# EAGLE board XmegaA4U_v2.1 (EAGLE 6.3)
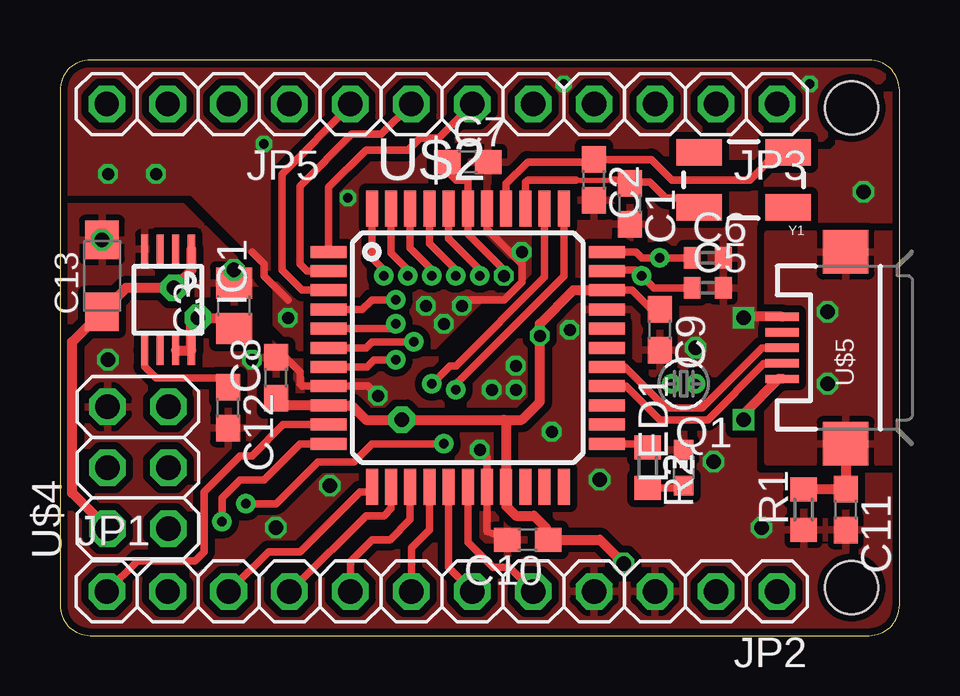
[diagram p0: board, top side]
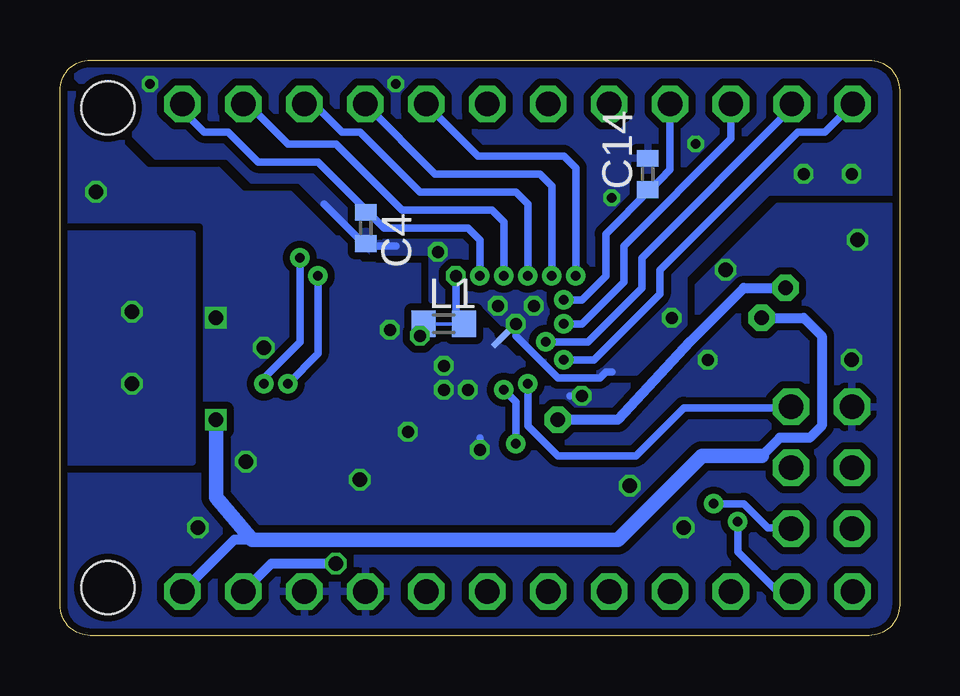
[diagram p1: board, bottom side, seen from below]

Size 35 x 24 mm. Coordinates in mm from the lower left corner, seen from the top.
Outline: 0,22.73 0,1.27 arc90 1.27,0 33.73,0 arc90 35,1.27 35,22.73 arc90 33.73,24 1.27,24 arc90 0,22.73
Copper layers (1*16): Top 0.035mm / dielectric 1.5mm / Bottom 0.035mm
Design rules "Fusion_eagle_rule_v1.1 *": minimum track width 6mil, minimum drill 12mil, track to track 6mil, track to pad 6mil, pad to pad 6mil, via to via 6mil, smd to smd 0mil, copper to edge 10mil, drill to drill 10mil, minimum pad ring 0.1mm, minimum via ring 6mil, stop-mask expansion 2mil, vias tented up to drill 100mil, thermal gap 10mil
Holes 2.2 mm at 33,22 33,2

## Footprints (pad centres in the part's own frame; a part is rotated, then mirrored left to right if it is on the bottom)
C0603 = smd 1.1 x 1: 1 -0.85,0; 2 0.85,0
C0805 = smd 1.3 x 1.5: 1 -0.95,0; 2 0.95,0
C0402 = smd 0.7 x 0.9: 1 -0.65,0; 2 0.65,0
SMC_A = smd 1.6 x 1.4: + -1.5,0; - 1.5,0
MSOP08 = smd 0.3 x 1.2: 1 -0.976,-2.113; 2 -0.326,-2.113; 3 0.324,-2.113; 4 0.974,-2.113; 5 0.974,2.112; 6 0.324,2.112; 7 -0.326,2.112; 8 -0.976,2.112
1X08_ROUND = drill 1.016 pad 1.524 octagon: 1 -8.89,0; 2 -6.35,0; 3 -3.81,0; 4 -1.27,0; 5 1.27,0; 6 3.81,0; 7 6.35,0; 8 8.89,0
1X04_ROUND = drill 1.016 pad 1.524 octagon: 1 -3.81,0; 2 -1.27,0; 3 1.27,0; 4 3.81,0
R0603 = smd 1 x 1.1: 1 -0.85,0; 2 0.85,0
CHIP-LED0603 = smd 0.8 x 0.8: A 0,-0.75; C 0,0.75
TC26V_1.00 = drill 0.4 pad 0.8: 1 -0.5,0; 2 0.5,0
LINE-1.27X0.254MM = smd 0.635 x 0.254: P$1 -0.318,0; P$2 0.318,0
TQFP44 = smd 1.5 x 0.5: 1 -5.8,4; 2 -5.8,3.2; 3 -5.8,2.4; 4 -5.8,1.6; 5 -5.8,0.8; 6 -5.8,0; 7 -5.8,-0.8; 8 -5.8,-1.6; 9 -5.8,-2.4; 10 -5.8,-3.2; 11 -5.8,-4; 23 5.8,-4; 24 5.8,-3.2; 25 5.8,-2.4; 26 5.8,-1.6; 27 5.8,-0.8; 28 5.8,0; 29 5.8,0.8; 30 5.8,1.6; 31 5.8,2.4; 32 5.8,3.2; 33 5.8,4 | smd 0.5 x 1.5: 12 -4,-5.8; 13 -3.2,-5.8; 14 -2.4,-5.8; 15 -1.6,-5.8; 16 -0.8,-5.8; 17 0,-5.8; 18 0.8,-5.8; 19 1.6,-5.8; 20 2.4,-5.8; 21 3.2,-5.8; 22 4,-5.8; 34 4,5.8; 35 3.2,5.8; 36 2.4,5.8; 37 1.6,5.8; 38 0.8,5.8; 39 0,5.8; 40 -0.8,5.8; 41 -1.6,5.8; 42 -2.4,5.8; 43 -3.2,5.8; 44 -4,5.8
2X03_FIXED = drill 1.016 pad 1.524 octagon: 1 -2.54,-1.27; 2 -2.54,1.27; 3 0,-1.27; 4 0,1.27; 5 2.54,-1.27; 6 2.54,1.27
USB-MICROB = smd 0.35 x 1.4: D+ 0,2.65; D- -0.65,2.65; GND 1.3,2.65; ID 0.65,2.65; VBUS -1.3,2.65 | smd 1.8 x 1.9: MT1 -4,0; MT2 4,0
CRYSTAL-SMD-5X3 = smd 1.9 x 1.1: 1 -1.85,-1.15; 2 1.85,-1.15; 3 1.85,1.15; 4 -1.85,1.15

## Placement (x,y rotation side)
C1  [C0603]  23.75,18 270 top
C2  [C0603]  22.25,19 270 top
C3  [C0805]  7.25,13.75 90 top
C4  [C0402]  22.25,17 270 bottom
C5  [C0402]  27,14.5 0 top
C6  [C0402]  27,15.75 0 top
C7  [C0603]  17,19.75 0 top
C8  [C0603]  9,10.75 90 top
C9  [C0603]  25,12.75 270 top
C10  [C0603]  19.5,4 180 top
C11  [C0603]  32.75,5.25 270 top
C12  [C0603]  7,9.5 270 top
C13  [SMC_A]  1.75,15 90 top
C14  [C0402]  10.5,19.25 90 bottom
IC1  [MSOP08]  4.5,14 180 top
JP1  [1X08_ROUND]  10.84,1.84 0 top
JP2  [1X04_ROUND]  26.08,1.84 180 top
JP3  [1X08_ROUND]  21,22.16 180 top
JP5  [1X04_ROUND]  5.76,22.16 180 top
L1  [R0603]  19,13 0 bottom
LED1  [CHIP-LED0603]  26,7 0 top
Q1  [TC26V_1.00]  26,10.5 180 top
R1  [R0603]  31,5.25 90 top
R2  [R0603]  24.5,7 270 top
U$1  LINE1.27X0.254MM  [LINE-1.27X0.254MM]  16.5,12.5 45 bottom
U$2  XMEGA-A4TQFP  [TQFP44]  17,12 0 top
U$4  AVR-PDIFIXED  [2X03_FIXED]  3.25,7 90 top
U$5  USB+SHIELDMICRO  [USB-MICROB]  32.75,12 90 top
Y1  [CRYSTAL-SMD-5X3]  28.5,19 180 top

## Library data of the parts
C1-C14 L1 R1 R2 = rcl
IC1 JP1-JP3 JP5 Q1 U$4 U$5 = hsa
LED1 = led
U$1 = sekalaista
U$2 = avr-7
Y1 = SparkFun

## Nets
+3V3: C8.1 C9.1 C10.1 C13.+ IC1.1 JP2.2 L1.1 U$2.9 U$2.19 U$2.31 U$4.2
+5V: C3.1 IC1.7 IC1.8 JP2.1 U$5.VBUS
AGND: C4.2 C7.2 C14.2 U$1.P$2 U$2.38
GND: C1.2 C2.2 C3.2 C5.2 C6.2 C8.2 C9.2 C10.2 C11.2 C12.2 C13.- IC1.4 JP2.3 JP2.4 LED1.C R1.1 U$1.P$1 U$2.8 U$2.18 U$2.30 U$4.6 U$5.GND
MNT: C11.1 R1.2 U$5.MT1 U$5.MT2
N$1: C1.1 U$2.36 Y1.3
N$2: C2.1 U$2.37 Y1.1
N$4: R2.1 U$2.23
N$5: LED1.A R2.2
N$10: U$2.26 U$5.D-
N$11: U$2.27 U$5.D+
N$17: JP3.2 U$2.41
N$18: JP3.3 U$2.42
N$19: JP3.4 U$2.43
N$20: JP3.5 U$2.44
N$21: JP3.6 U$2.1
N$22: JP3.7 U$2.2
N$25: JP1.2 U$2.11
N$26: JP1.3 U$2.12
N$27: JP1.4 U$2.13
N$28: JP1.5 U$2.14
N$29: JP1.6 U$2.15
N$30: JP1.7 U$2.16
N$33: JP5.2 U$2.5
N$34: JP5.3 U$2.6
N$36: U$2.35 U$4.5
N$40: C12.1 IC1.5
N$42: U$2.34 U$4.1
VCC/2: C7.1 L1.2 U$2.39
XA0: C4.1 JP3.1 U$2.40
XA7: JP3.8 U$2.3
XB0: C14.1 JP5.1 U$2.4
XB3: JP5.4 U$2.7
XC0: JP1.1 U$2.10
XC7: JP1.8 U$2.17
XE2: C5.1 Q1.2 U$2.32
XE3: C6.1 Q1.1 U$2.33

## Tracks (layer width: path | path; a pad name or v marks a point on that pad's centre or on a via)
+3V3  (via drill 0.5, 0.6, 0.6 pad 1.1)
  Top 0.305: U$2.31 23.85,14.4 24.75,13.5 25.1,13.5 C9.1 | 20.25,4.1 C10.1
  Top 0.406: 18.5,9 v14.25,9 12.75,9 12.15,9.6 U$2.9 9.3,9.6 C8.1 | 18.5,9 18.6,8.9 U$2.19 18.6,5.4 19,5 19.75,5 20.25,4.5 20.25,4.1 | U$4.2 0.5,5.94 0.5,12.25 C13.+ 2.75,14.5 v4.75,14.5 5.48,15.23 IC1.1 | 18.5,9 19.25,9 20,9.75 v20,12.5 20,13 21.4,14.4 U$2.31 | C10.1 22.5,4 v23.5,3
  Bottom 0.305: L1.1 v20,12.5
  Bottom 0.406: v14.25,9 11.75,9 8.75,12.25 6.5,14.5 v4.75,14.5 | v23.5,3 26.19,3 JP2.2
+5V  (via drill 0.6, 0.6 pad 1.1)
  Top 0.406: IC1.7 IC1.8 5.48,12.98 v5.75,13.25 6.7,13.25 C3.1 | v28.5,9 28.5,9.25 29.95,10.7 U$5.VBUS
  Bottom 0.406: v5.75,13.25 4,13.25 3.25,12.5 3.25,8.75 3.75,8.25 5,8.25 5.75,7.5 | 26.98,4 27.73,4 JP2.1
  Bottom 0.61: v28.5,9 28.5,5.77 26.98,4 11.75,4 8.25,7.5 5.75,7.5
AGND  (via drill 0.4, 0.5)
  Top 0.305: U$2.38 17.8,16.95 19.25,15.5 19.25,14.75 18.5,14 17,14 | 8,16 8.5,15.5 8.5,15 9.5,14
  Bottom 0.305: 12,11 12.25,11 12.5,10.75 14.25,10.75 16,12.5 | 21,16.25 22.25,16.25 24,18
  other vias: 15.25,13.75 2,19.25 4,19.25 8.5,20.5 19.25,16 9.5,13.25 31.25,23 21,23 12,18.25 16.75,13.75 16,13
  pour Top (isolate 0.305): -1,25 -1,18.5 5.5,18.5 9,15 9,13 11,11 14.5,11 17.5,14 19.5,14 19.5,20 31,20 36,25
  pour Bottom (isolate 0.305): -2,26 -2,18.5 5.5,18.5 9,15 9,13 11,11 14.5,11 17.5,14 19.5,14 19.5,16 22,16 25,19 27,19 28,20 31,20 37,26
GND  (via drill 0.5, 0.6)
  Top 0.305: C10.2 17.8,4.35 U$2.18 17.8,7.45 v17.5,7.75 | 9.4,11.6 10,11 10,10.5 10.1,10.4 U$2.8 12.85,10.4 v13.25,10
  Top 0.406: U$5.GND 28.7,13.3 v28.5,13.25
  Bottom 0.305: v13.25,10 13.75,10 | v17.5,7.75 17.5,8.25
  other vias: 21.25,12.75 26.5,12 18,10.25 1.75,16.5 29.25,4.5 33.5,18.5 2,11.5 20.5,8.5 22.5,6.5 8,11.5 7.25,15.25 11.25,6.25 9,4.5 27.25,7.25 19,10.25 19,11.25
  pour Bottom (isolate 0.305, rank 2): -7,28 47,28 47,-4 -7,-4
  pour Top (isolate 0.305, rank 2): -6,27 46,27 46,-3 -6,-3
MNT  (via drill 0.6)
  Top 0.406: U$5.MT1 C11.1 R1.2
  other vias: 32,13.5 32,10.5
  pour Top (isolate 0.305): 36,16.75 29.5,16.75 29.5,7.25 36,7.25
  pour Bottom (isolate 0.305): 37,16.75 29.5,16.75 29.5,7.25 37,7.25
N$1
  Top 0.203: 21.5,19 23,19
  Top 0.305: U$2.36 19.4,18.9 19.5,19 21.5,19 | 23.9,19 C1.1 | Y1.3 26.25,18.25 25.25,18.25 24.6,18.9 23.8,18.9 C1.1 | 23,19 23.5,19 23.6,18.9 23.7,18.9 C1.1
N$2
  Top 0.305: U$2.37 18.6,18.85 19.5,19.75 22.4,19.75 C2.1 24.65,19.85 25.5,19 28.75,19 29.9,20.15 Y1.1
N$3
  Bottom 0.152: 18.5,13 19.5,13
N$4
  Top 0.305: U$2.23 24.35,8 R2.1
N$5
  Top 0.305: R2.2 25.9,6.15 LED1.A
N$10
  Top 0.305: U$2.26 23.6,10.4 25,9 27,9 29.35,11.35 U$5.D-
N$11
  Top 0.305: U$2.27 23.55,11.2 25.25,9.5 26.75,9.5 29.25,12 U$5.D+
N$17  (via drill 0.4 pad 0.8)
  Top 0.305: U$2.41 15.4,16.35 16.5,15.25 v16.5,15
  Bottom 0.305: v16.5,15 16.5,17.25 17,17.75 20.75,17.75 23.5,20.5 25.5,20.5 27.16,22.16 JP3.2
N$18  (via drill 0.4 pad 0.8)
  Top 0.305: U$2.42 14.6,16.15 15.5,15.25 v15.5,15
  Bottom 0.305: v15.5,15 15.5,18 16,18.5 20,18.5 22.5,21 23.25,21 24.41,22.16 JP3.3
N$19  (via drill 0.4 pad 0.8)
  Top 0.305: U$2.43 13.8,15.95 14.5,15.25 v14.5,15
  Bottom 0.305: v14.5,15 14.5,18.75 15,19.25 19.36,19.25 JP3.4
N$20  (via drill 0.4 pad 0.8)
  Top 0.305: U$2.44 13,15.75 13.5,15.25 v13.5,15
  Bottom 0.305: v13.5,15 13.5,19.5 14,20 17.57,20 JP3.5
N$21
  Top 0.305: U$2.1 11.2,18.7 12.75,20.25 14.5,20.25 15,20.75 15.78,20.75 JP3.6
N$22
  Top 0.305: U$2.2 10.3,15.2 10,15.5 10,18.75 12.15,20.9 13.39,20.9 JP3.7
N$25  (via drill 0.4 pad 0.8)
  Top 0.305: v6.75,4.75 6.75,5.75 7.5,6.5 8.5,6.5 10,8 U$2.11
  Bottom 0.305: JP1.2 4.53,1.88 5.12,1.88 6.75,3.5 v6.75,4.75
N$26
  Top 0.305: U$2.12 12.8,6 12.5,6 10,3.5 8.69,3.5 JP1.3
N$27
  Top 0.305: U$2.13 13.8,5.3 13.5,5 12.75,5 9.82,2.07 JP1.4
N$28
  Top 0.305: U$2.14 14.6,4.85 13.75,4 13.02,4 12.11,3.09 JP1.5
N$29
  Top 0.305: U$2.15 15.4,4.4 14.65,3.65 JP1.6
N$30
  Top 0.305: U$2.16 16.2,2.85 JP1.7
N$33  (via drill 0.4 pad 0.8)
  Top 0.305: U$2.5 13.8,12.8 v14,13
  Bottom 0.305: v14,13 13.25,13 11.5,14.75 11.5,16.25 7.03,20.72 JP5.2
N$34  (via drill 0.4 pad 0.8)
  Top 0.305: U$2.6 12.75,12 13,12.25 v14.75,12.25
  Bottom 0.305: v14.75,12.25 13,12.25 10.75,14.5 10.75,15.75 4.49,22.01 JP5.3
N$36  (via drill 0.4 pad 0.8)
  Top 0.305: v15.5,10.5 16.25,11.25 16.5,11.25 20.2,14.95 U$2.35
  Bottom 0.305: v15.5,10.5 15.5,8.75 14.25,7.5 11,7.5 9,9.5 4.31,9.5 U$4.5
N$40
  Top 0.305: C12.1 6.6,10.75 4,10.75 3.53,11.22 IC1.5
N$42  (via drill 0.4 pad 0.8)
  Top 0.305: U$2.34 21,15 16.5,10.5 v16.5,10.25 | v7.75,5.5 9,5.5 10.75,7.25 12.25,7.25 13,8 v16,8
  Bottom 0.305: v16.5,10.25 16,9.75 v16,8 | v7.75,5.5 6.5,5.5 5.5,4.5 4.56,4.5 U$4.1
VCC/2  (via drill 0.5)
  Top 0.305: v18.5,15 18.5,15.25 17,16.75 U$2.39 17,19 16.5,19 16.15,19.35 C7.1
  Bottom 0.305: v18.5,15 18.5,13.35 L1.2
XA0  (via drill 0.4 pad 0.8)
  Top 0.305: U$2.40 16.2,16.55 17.5,15.25 v17.5,15
  Bottom 0.305: v17.5,15 17.5,16.5 18,17 21.5,17 21.75,17.25 22.15,17.65 | JP3.1 29.89,21.89 29,21 28,21 26.75,19.75 24.25,19.75 22.15,17.65 | C4.1 22.15,17.65
XA7
  Top 0.305: U$2.3 10.1,14.4 9.25,15.25 9.25,19.25 12.11,22.11 JP3.8
XB0  (via drill 0.4 pad 0.8)
  Top 0.305: U$2.4 12.6,13.6 13,14 v14,14
  Bottom 0.305: v14,14 13.25,14 12.25,15 12.25,16.75 10.4,18.6 | JP5.1 9.57,19.43 10,19 10.4,18.6 | C14.1 10.4,18.6
XB3  (via drill 0.4 pad 0.8)
  Top 0.305: U$2.7 12.8,11.2 13.1,11.5 v14,11.5
  Bottom 0.305: v14,11.5 12.75,11.5 10,14.25 10,15.25 4.25,21 3.11,21 JP5.4
XC0
  Top 0.305: U$2.10 9.3,8.8 8,7.5 7.5,7.5 6,6 6,3.5 5.62,3.12 3.23,3.12 JP1.1
XC7
  Top 0.305: U$2.17 17,3.89 18.05,2.84 18.73,2.84 JP1.8
XE2  (via drill 0.4 pad 0.8)
  Top 0.305: U$2.32 22.85,15.25 24,15.25 v24.25,15 24.75,14.5 C5.1
  Bottom 0.305: v24.25,15 24.25,11.77 Q1.2
XE3  (via drill 0.4 pad 0.8)
  Top 0.305: U$2.33 24,16 24.25,15.75 v25,15.75 C6.1
  Bottom 0.305: v25,15.75 25,12.25 26.5,10.75 Q1.1

## Text on the board
tTest: B | A | C | GND / GND / +3.3V / +5V
bTest: B3 | B2 | B1 | B0 | A7 | A6 | A5 | A4 | A3 | A2 | A1 | A0 | XMEGA A4U v2.1 / HSa 2012 | C3 | C4 | C5 | C6 | C7 | +5V / +3.3V / GND / GND